# Altium PCB PCB1.PcbDoc
Units mm, origin at the board's own origin, x right, y up, seen from the top; angles counter-clockwise.
Board outline 28 x 36 mm, 2 copper layers (Component Side, Bottom Layer), stack 1.671 mm thick; 44 components, 38 nets, 147 pads, 150 vias.
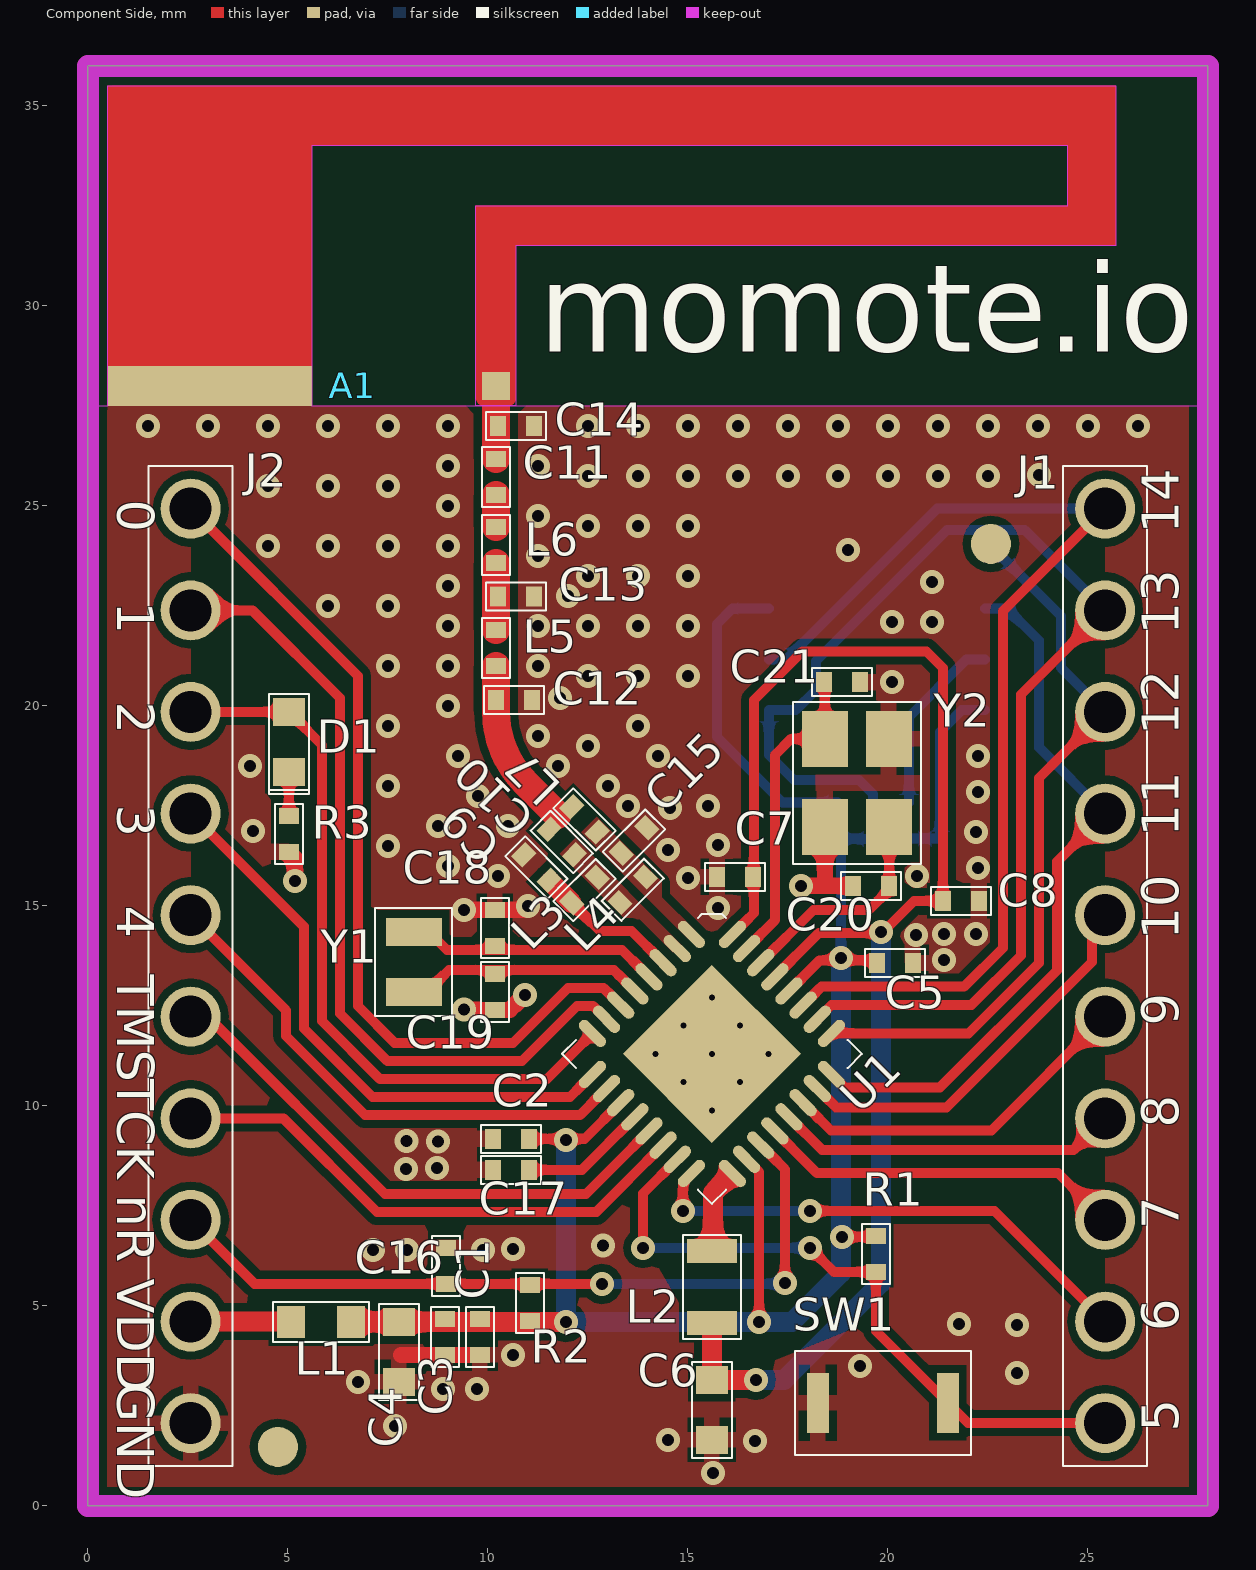
[diagram p0: Component Side view]
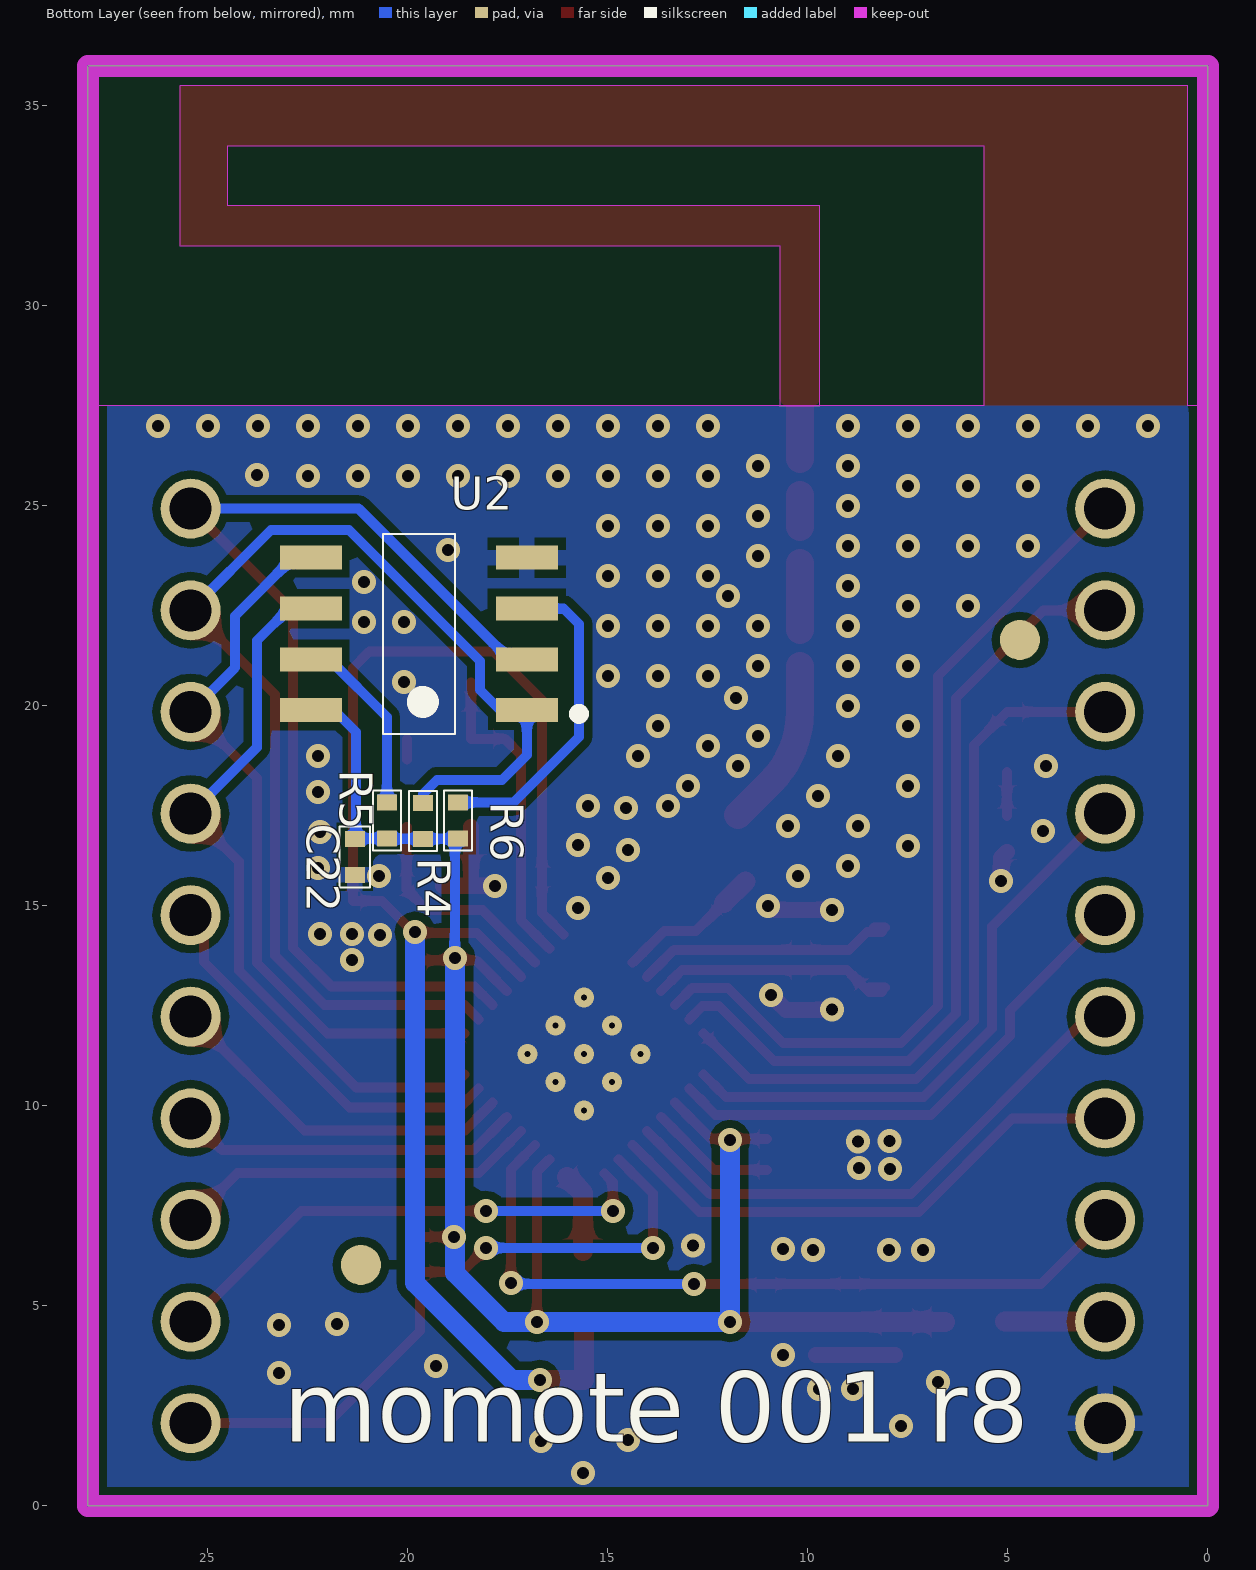
[diagram p1: Bottom Layer view, seen from below]
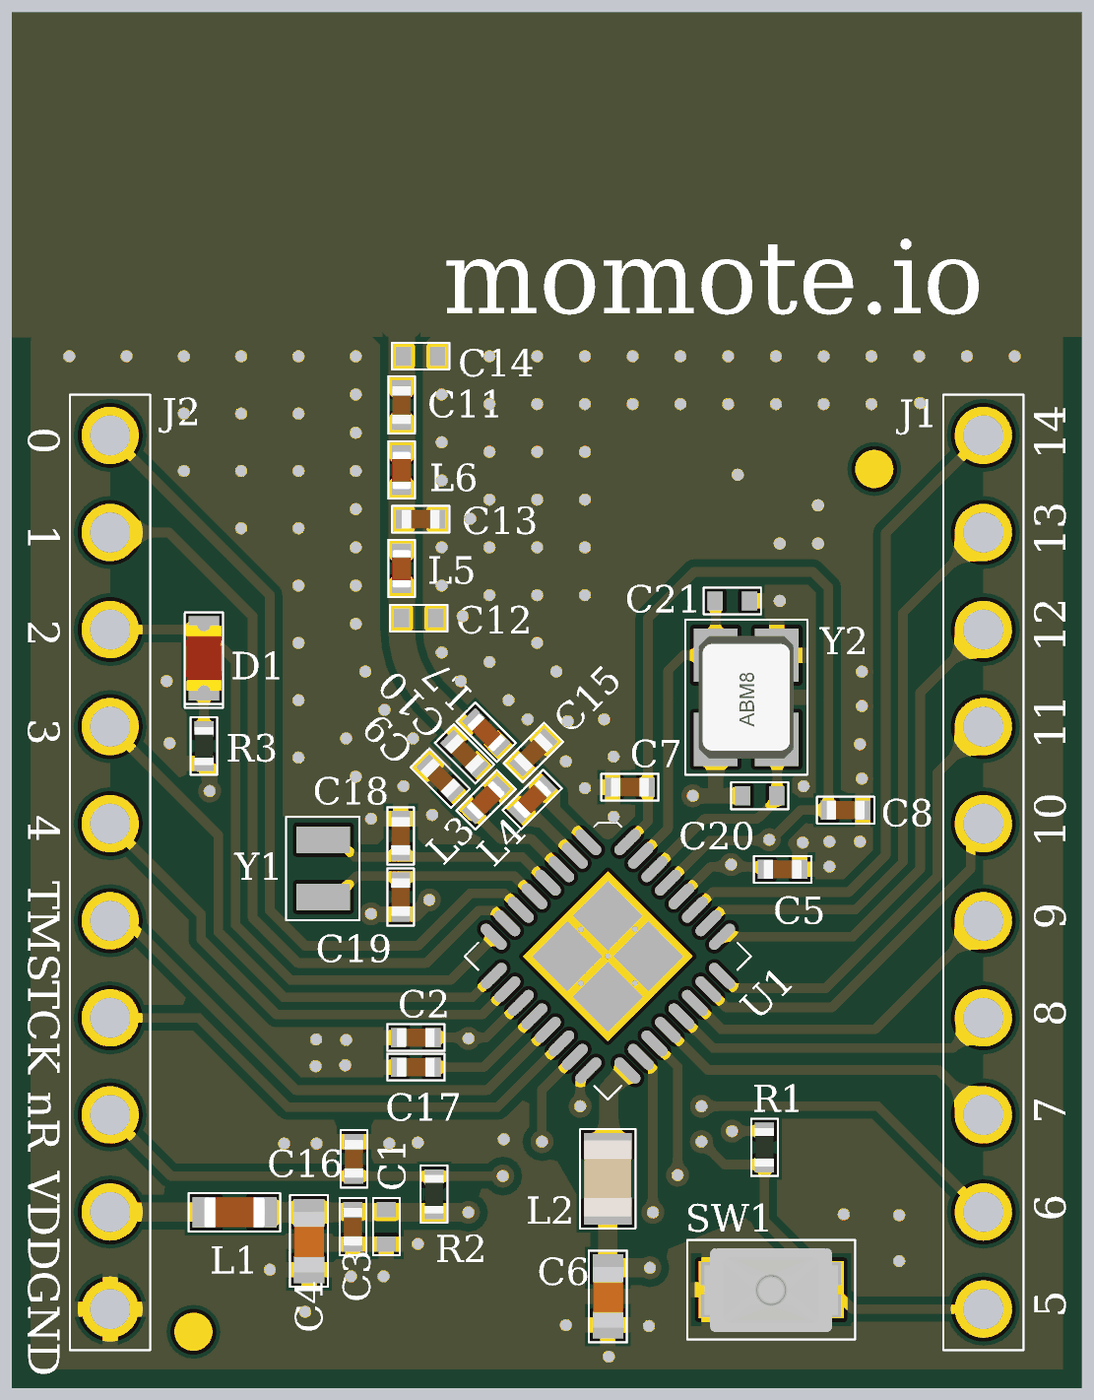
[diagram p2: 3D render of the assembled board from above, using the file's embedded part models]
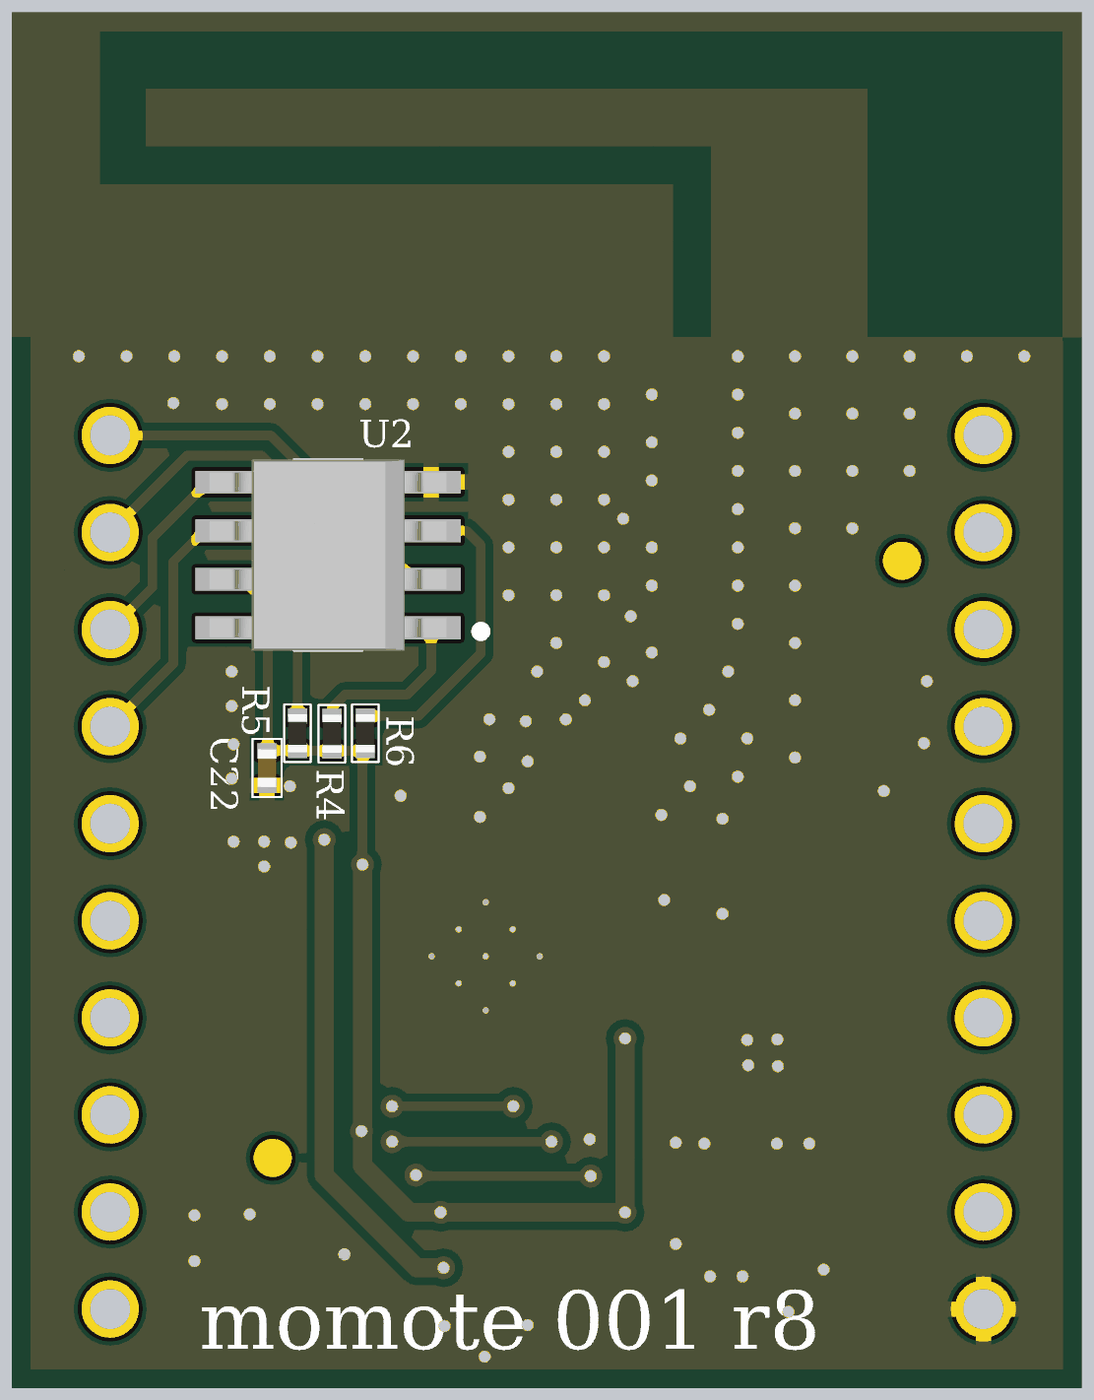
[diagram p3: 3D render of the assembled board from below, using the file's embedded part models]

## Layer stack, top to bottom
Top Solder: solder mask 0.0102, Solder Resist, Dk 3.5
Component Side: signal copper 0.0356
Dielectric 1: core 1.6, FR-4, Dk 4.2
Bottom Layer: signal copper 0.0356
Solder Side: solder mask 0.0102, Solder Resist, Dk 3.5

## Board outline
0,0 0,36 28,36 28,0

## Design rules (kind name [scope] priority, off if disabled: settings)
Clearance [NOT InComponent('A1') AND NOT InComponent('C13') vs NOT InComponent('A1') AND NOT InComponent('C13')] p1: gap=0.2
ComponentClearance ComponentClearance_BATT [All vs InComponent('BT1')] p1 off: gap=0.254 collisioncheckmode=3 verticalgap=0.254 showdistances=FALSE
ComponentClearance [not (HasFootprint('ANTENNA_PCB_1') or HasFootprint('BS-2-1')) vs not (HasFootprint('ANTENNA_PCB_1') or HasFootprint('BS-2-1'))] p2 off: gap=0.254 collisioncheckmode=3 verticalgap=0.254 showdistances=FALSE
MinimumSolderMaskSliver [All vs InComponent('U1')] p1: minsoldermaskwidth=0.02
MinimumSolderMaskSliver MinimumSolderMaskSliver_1 [NOT InComponent('A1')] p2: minsoldermaskwidth=0.025
PlaneConnect [All] p1: planeconnectstyle=Direct reliefexpansion=0.508 reliefentries=4 reliefconductorwidth=0.254 reliefairgap=0.254
PolygonConnect PolygonConnect_1 [InComponentClass('RF')] p1: connectstyle=Direct reliefconductorwidth=0.3 reliefentries=4 polygonreliefangle="90 Angle" airgapwidth=0.2
PolygonConnect PolygonConnect_2 [All vs IsVia] p2: connectstyle=Direct reliefconductorwidth=0.3 reliefentries=4 polygonreliefangle="90 Angle" airgapwidth=0.2
PolygonConnect PolygonConnect_3 [All vs InNet('RF_N') OR InNet('RF_P')] p3: connectstyle=Direct reliefconductorwidth=0.3 reliefentries=4 polygonreliefangle="90 Angle" airgapwidth=0.2
PolygonConnect [All] p4: connectstyle=Relief reliefconductorwidth=0.4 reliefentries=4 polygonreliefangle="90 Angle" airgapwidth=0.2
RoutingVias [All] p1: holewidth=0.2 width=0.5 viastyle="Through Hole" minholewidth=0.2 minwidth=0.5 maxholewidth=1 maxwidth=2
ShortCircuit ShortCircuit_antenna [All vs InComponent('A1')] p1: allowed=TRUE
ShortCircuit [All] p2: allowed=FALSE
SilkToSilkClearance [All] p1: silktosilkclearance=0.051
SilkToSolderMaskClearance [NOT InComponent('A1')] p1: minsilkscreentomaskgap=0 clearancetoexposedcopper=TRUE
SolderMaskExpansion [All] p1: expansion=0.1
Width [All] p1: maxlimit=1 minlimit=0.25 preferedwidth=0.3 minimp=50.000000 maximp=50.000000 favimp=50.000000
24 further rules are at their usual default settings.

## Classes and differential pairs
polygon class rf: NONET_L01_P023 NONET_L01_P025
component class RF: A1 C9 C10 C11 C12 C13 C14 C15 L3 L4 L5 L6 L7

## Components (designator, comment, footprint, x,y, rotation, side; value= is the part's Value field where it differs from the comment)
A1 "2.45GHz" ANTENNA_PCB_INATEL3 10.2,28 r0 top
C1 "DNM" 0402 9.8,4.225 r90 top
C2 "100nF" "0402 - CAP" 10.575,9.175 r0 top
C3 "100nF" "0402 - CAP" 8.925,4.225 r90 top
C4 "10uF" "0603 - CAP" 7.775,3.85 r90 top
C5 "100nF" "0402 - CAP" 20.175,13.576 r180 top
C6 "10uF" "0603 - CAP" 15.6,2.4 r90 top
C7 "100nF" "0402 - CAP" 16.175,15.725 r0 top
C8 "100nF" "0402 - CAP" 21.825,15.125 r180 top
C9 "6.8pF" "0402 - CAP" 11.212,15.961 r135 top
C10 "1pF" "0402 - CAP" 11.848,16.598 r315 top
C11 "12pF" "0402 - CAP" 10.2,25.725 r270 top
C12 "DNM" 0402 10.65,20.15 r180 top
C13 "1pF" "0402 - CAP" 10.7,22.737 r180 top
C14 "DNM" 0402 10.7,27 r180 top
C15 "1pF" "0402 - CAP" 13.651,16.633 r45 top
C16 "100nF" "0402 - CAP" 8.95,6 r270 top
C17 "1uF" "0402 - CAP" 10.575,8.4 r0 top
C18 "12pF" "0402 - CAP" 10.175,14.45 r270 top
C19 "12pF" "0402 - CAP" 10.175,12.85 r90 top
C20 "DNM" 0402 19.575,15.5 r0 top
C21 "DNM" 0402 18.857,20.598 r180 top
C22 "100nF" "0402 - CAP" 21.325,16.225 r90 bottom
D1 "Status" "0603 - LED" 5.025,19.1 r270 top
J1 "CONN" "CONN_HEADER ARDUINO SHIELD" 25.43,2.07 r90 top
J2 "CONN" "CONN_HEADER ARDUINO SHIELD" 2.57,2.07 r90 top
L1 "BLM18HE152SN1" "0603 - IND" 5.825,4.6 r180 top
L2 "10uH" "0805 - CAP" 15.6,5.475 r90 top
L3 "2.4nH" "0402 - IND" 12.414,15.396 r225 top
L4 "6.2nH" "0402 - IND" 13.619,15.406 r45 top
L5 "2nH" "0402 - IND" 10.2,21.45 r270 top
L6 "2nH" "0402 - IND" 10.2,24.025 r270 top
L7 "2.7nH" "0402 - IND" 12.414,17.163 r315 top
R1 "100K" "0402 - RES" 19.7,6.3 r90 top
R2 "100K" "0402 - RES" 11.05,5.075 r270 top
R3 "100R" "0402 - RES" 5.025,16.8 r90 top
R4 "2K2" "0402 - RES" 19.625,17.125 r270 bottom
R5 "10K" "0402 - RES" 20.525,17.137 r270 bottom
R6 "10K" "0402 - RES" 18.75,17.137 r270 bottom
SW1 "EVP-AWCA2A" EVP-AWCA2A 19.875,2.575 r180 top
U1 "CC2650F128RHB" "CC2650F128RHB - CM" 15.6,11.3 r45 top
U2 "W25X40CLSNIG" SOIC-8 19.725,21.8 r270 bottom
Y1 "32.768kHz" FC-12M 8.15,13.6 r270 top
Y2 "24MHz" XT_DFN_LCC_32X25 19.223,18.078 r90 top

## Footprints (in the part's own frame and the unit in brackets; to place one, negate y for a bottom-side part, rotate by r counter-clockwise, add the part's x,y. Pads: shape width x height; smd on the part's side, far side on the other; paste and mask are expansions set on the pad)
0402 [mm]
  rect 0.4x0.5 smd: 1(-0.45,0) 2(0.45,0)
  silkscreen extent -0.75,-0.35 0.75,0.35
"0402 - CAP" [mm]
  rect 0.4x0.5 smd: 1(-0.45,0) 2(0.45,0)
  silkscreen extent -0.75,-0.35 0.75,0.35, body extent -0.5,-0.25 0.5,0.25, height 0.49
"0402 - IND" [mm]
  rect 0.4x0.5 smd: 1(-0.45,0) 2(0.45,0)
  silkscreen extent -0.75,-0.35 0.75,0.35, body extent -0.49,-0.25 0.51,0.25, height 0.49
"0402 - RES" [mm]
  rect 0.4x0.5 smd: 1(-0.45,0) 2(0.45,0)
  silkscreen extent -0.75,-0.35 0.75,0.35, body extent -0.5,-0.25 0.5,0.25, height 0.29
"0603 - CAP" [mm]
  rect 0.7x0.8 smd: 1(-0.75,0) 2(0.75,0)
  silkscreen extent -1.2,-0.5 1.2,0.5, body extent -0.83,-0.41 0.77,0.39, height 0.49
"0603 - IND" [mm]
  rect 0.7x0.8 smd: 1(-0.75,0) 2(0.75,0)
  silkscreen extent -1.2,-0.5 1.2,0.5, body extent -0.8,-0.4 0.8,0.4, height 0.79
"0603 - LED" [mm]
  rect 0.7x0.8 smd: 1(-0.75,0) 2(0.75,0)
  silkscreen extent -1.2,-0.5 1.3,0.5, body extent -0.85,-0.45 0.85,0.45, height 0.9
"0805 - CAP" [mm]
  rect 0.6x1.25 smd: 1(-0.9,0) 2(0.9,0)
  silkscreen extent -1.3,-0.72 1.3,0.72, body extent -0.99,-0.62 1.01,0.63, height 0.58
ANTENNA_PCB_INATEL3 [mm]
  rect 0.7x0.7 smd paste-2 mask-2: 1(0,0)
  rect 5.1x1 smd paste-2 mask-2: 2(-7.15,0)
  Component Side region: -9.7,-0.5 -9.7,7.5 15.5,7.5 15.5,3.5 0.5,3.5 0.5,-0.3 0.494,-0.352 0.474,-0.4 0.442,-0.442 0.4,-0.474 0.352,-0.493 0.3,-0.5 -0.3,-0.5 -0.351,-0.494 -0.4,-0.474 -0.441,-0.442 -0.473,-0.4 -0.483,-0.375 -0.493,-0.352 -0.5,-0.3 -0.5,4.5 14.3,4.5 14.3,6 -4.6,6 -4.6,-0.5
  Keep-Out Layer region: -9.7,8 -10.2,8 -10.2,-0.5 -9.7,-0.5 -9.7,7.5 15.5,7.5 15.5,3.5 0.5,3.5 0.5,-0.5 -0.5,-0.5 -0.5,4.5 14.3,4.5 14.3,6 -4.6,6 -4.6,-0.5 17.8,-0.5 17.8,8
"CC2650F128RHB - CM" [mm]
  oval 0.28x0.85 smd: 1(1.75,2.475) 2(1.25,2.475) 3(0.75,2.475) 4(0.25,2.475) 5(-0.25,2.475) 6(-0.75,2.475) 7(-1.25,2.475) 8(-1.75,2.475) 17(-1.75,-2.475) 18(-1.25,-2.475) 19(-0.75,-2.475) 20(-0.25,-2.475) 21(0.25,-2.475) 22(0.75,-2.475) 23(1.25,-2.475) 24(1.75,-2.475)
  oval 0.85x0.28 smd: 9(-2.475,1.75) 10(-2.475,1.25) 11(-2.475,0.75) 12(-2.475,0.25) 13(-2.475,-0.25) 14(-2.475,-0.75) 15(-2.475,-1.25) 16(-2.475,-1.75) 25(2.475,-1.75) 26(2.475,-1.25) 27(2.475,-0.75) 28(2.475,-0.25) 29(2.475,0.25) 30(2.475,0.75) 31(2.475,1.25) 32(2.475,1.75)
  rect 3.15x3.15 smd paste-5: 33(0,0)
  silkscreen extent -2.65,-2.65 2.65,2.65, body extent -2.54,-2.54 2.54,2.54, height 1
"CONN_HEADER ARDUINO SHIELD" [mm]
  round 1.5 hole 1.05 paste-4: 1(0,0) 2(2.54,0) 3(5.08,0) 4(7.62,0) 5(10.16,0) 6(12.7,0) 7(15.24,0) 8(17.78,0) 9(20.32,0) 10(22.86,0)
  silkscreen extent -1.07,-1.05 23.92,1.05
EVP-AWCA2A [mm]
  rect 0.55x1.5 smd paste-2: 1(-1.625,0) 2(1.625,0)
  silkscreen extent -2.2,-1.3 2.2,1.3, body extent -1.75,-1.09 1.75,1.11, height 0.56
FC-12M [mm]
  rect 0.7x1.4 smd: 1(-0.75,0) 2(0.75,0)
  silkscreen extent -1.35,-0.97 1.35,0.95, body extent -1.02,-0.6 1.02,0.6, height 0.6
SOIC-8 [mm]
  rect 0.6x1.55 smd: 1(1.905,2.7) 2(0.635,2.7) 3(-0.635,2.7) 4(-1.905,2.7) 5(-1.905,-2.7) 6(-0.635,-2.7) 7(0.635,-2.7) 8(1.905,-2.7)
  silkscreen extent -2.5,-0.9 2.5,4.12, body extent -2.5,-3.1 2.5,3.1, height 1.75
XT_DFN_LCC_32X25 [mm]
  rect 1.4x1.15 smd: 1(-1.1,-0.8) 2(1.1,0.8) 3(-1.1,0.8) 3(1.1,-0.8)
  silkscreen extent -2.02,-1.6 2.03,1.6, body extent -1.6,-1.24 1.6,1.24, height 0.8

## Part data
A1: library part "ANTENNA 2.4GHz_INATEL", "ANTENNA 2.4GHz INATEL"
C1 C12 C14 C20 C21: library part CAP
C2 C3 C5 C7 C8 C16 C22: library part CAP, "CAP CER 0.1UF 6.3V 10% X7R 0402"
C4 C6: library part CAP, "CAP CER 10UF 6.3V 20% X5R 0603"
C9: library part CAP, "CAP CER 6.8PF 50V NP0 0402"
C10 C13 C15: library part CAP, "CAP CER 1PF 50V NP0 0402"
C11 C18 C19: library part CAP, "CAP CER 12PF 50V NP0 0402"
C17: library part CAP, "CAP CER 1UF 10V 10% X5R 0402"
D1: library part LED_R, "LED SUPER RED CLR THIN 0603 SMD"
J1 J2: "10POS SIL VERTICAL PIN HEADER"
L1: library part INDUCTOR, "FERRITE CHIP 1500 OHM 500MA 0603"
L2: library part INDUCTOR, "FIXED IND 10UH 110MA 520 MOHM"
L3: library part INDUCTOR, "FIXED IND 2.4NH 300MA 160 MOHM"
L4: library part INDUCTOR, "FIXED IND 6.2NH 300MA 220 MOHM"
L5 L6: library part INDUCTOR, "FIXED IND 2NH 300MA 100 MOHM SMD"
L7: library part INDUCTOR, "FIXED IND 2.7NH 300MA 150 MOHM"
R1 R2: library part RES, "RES SMD 100K OHM 5% 1/10W 0402"
R3: library part RES, "RES SMD 100 OHM 5% 1/10W 0402"
R4: library part RES, "RES SMD 2.2K OHM 5% 1/10W 0402"
R5 R6: library part RES, "RES SMD 10K OHM 5% 1/10W 0402"
SW1: library part SW_EVPAW, "Tactile Switch SPST-NO Top Actuated Surface Mount"
U1: "IC MCU 128KB FLASH PHY 32VQFN"
U2: library part SPI_FLASH_SOIC_8, "IC FLASH 4MBIT 104MHZ 8SOIC"
Y1: library part XTAL1, "Crystal 32.7680kHz 20ppm 12.5pF 90 kOhm -40°C - 85°C Surface Mount 2-SMD"
Y2: library part XTAL1, "Crystal 24.0000MHz 10ppm 9pF 40 Ohm -40°C - 85°C Surface Mount 4-SMD, No Lead (DFN, LCC)"

## Free pads (board coordinates)
  round 1 smd far side paste-1: 0(4.7,21.65) 0(21.175,6.025)
  round 1 smd paste-1: 0(4.75,1.475) 0(22.575,24.05)

## Via types
v1: diameter 0.6, hole 0.3, Component Side to Bottom Layer, tented both sides, 141 vias
v2: diameter 0.5, hole 0.15, Component Side to Bottom Layer, tented bottom, 9 vias

## Nets (pads, with @x,y where several pads share a name; then routed paths per layer and width w, separated by ;. In a path a pad name is that pad's centre, name@x,y a point inside that pad or via, vN(x,y) a via of type N, cw(c..) or ccw(c..) an arc to the next point about the centre after c; other vN are vias at no path point)
DCDC_SW: L2.2 U1.17 | length 2
  Component Side w0.5: L2.2@15.625,6.375 15.625,7.825 U1.17@16.025,8.225
DIO_0: J2.10 U1.6 | length 21.9
  Component Side w0.25: J2.10 6.75,20.75 6.75,12.496 7.671,11.575 10.625,11.575 12,12.95 12.889,12.95 U1.6
DIO_1: J2.9 U1.7 | length 20.4
  Component Side w0.25: J2.9 4.11,22.39 6.3,20.2 6.3,12.309 7.484,11.125 10.85,11.125 12.225,12.5 12.632,12.5 U1.7
DIO_2: D1.1 J2.8 U1.8 | length 18.4
  Component Side w0.25: J2.8 D1.1 5.85,19.025 5.85,12.123 7.298,10.675 11.475,10.675 U1.8
DIO_3: J2.7 U1.9 | length 14.7
  Component Side w0.25: J2.7 5.4,14.48 5.4,11.936 7.111,10.225 12.05,10.225 U1.9
DIO_4: J2.6 U1.10 | length 13.1
  Component Side w0.25: J2.6 4.95,12.39 4.95,11.75 6.925,9.775 12.307,9.775 U1.10
DIO_5: J1.1 R1.1 SW1.1 U1.15 | length 17.2
  Component Side w0.25: v1(13.875,6.45) 13.875,7.807 U1.15 ; v1(18.05,6.45) 18.65,5.85 R1.1 19.7,4.375 SW1.1 22.005,2.07 J1.1 J1.1@25.43,2.437
  Bottom Layer w0.25: v1(13.875,6.45) v1(18.05,6.45)
DIO_6: J1.2 U1.16 | length 12.7
  Component Side w0.25: v1(14.875,7.375) 14.875,8.1 U1.16 ; v1(18.051,7.375) 22.665,7.375 J1.2
  Bottom Layer w0.25: v1(14.875,7.375) v1(18.051,7.375)
DIO_7: J1.3 U1.20 | length 9.2
  Component Side w0.25: U1.20 18.221,8.325 24.255,8.325 J1.3
DIO_8: J1.4 U1.21 | length 8.6
  Component Side w0.25: U1.21 18.351,8.903 24.643,8.903 J1.4
DIO_9: J1.5 U1.22 | length 9
  Component Side w0.25: U1.22 18.574,9.387 22.587,9.387 J1.5
DIO_10: J1.6 U1.23 | length 9.9
  Component Side w0.25: U1.23 18.706,9.961 21.461,9.961 25.1,13.6 25.1,14.44 J1.6
DIO_11: J1.7 U1.24 U2.6 | length 18.1
  Component Side w0.25: U1.24 18.911,10.464 21.301,10.464 24.225,13.389 24.225,16.105 J1.7
  Bottom Layer w0.25: U2.6 22.972,22.435 23.775,21.632 23.775,18.965 J1.7
DIO_12: J1.8 U1.25 U2.5 | length 18.2
  Component Side w0.25: U1.25 22.013,11.813 23.775,13.575 23.775,18.195 J1.8
  Bottom Layer w0.25: U2.5 22.87,23.705 24.325,22.25 24.325,20.955 J1.8
DIO_13: J1.9 R4.1 U1.26 U2.1 | length 31.1
  Component Side w0.25: U1.26 18.59,12.522 22.084,12.522 23.325,13.764 23.325,20.285 J1.9
  Bottom Layer w0.25: R4.1 19.625,17.8 19.275,18.15 17.65,18.15 17.025,18.775 U2.1 17.695,19.895 18.2,20.4 18.2,21.125 21.475,24.4 23.42,24.4 J1.9
DIO_14: J1.10 U1.27 U2.2 | length 27.6
  Component Side w0.25: U1.27 18.34,12.979 21.904,12.979 22.875,13.95 22.875,22.375 J1.10
  Bottom Layer w0.25: U2.2 17.465,21.165 21.23,24.93 J1.10
GND: A1.2 C1.1 C2.1 C3.1 C4.1 C5.1 C6.1 C7.1 C8.1 C9.2 C12.1 C13.1 C14.1 C15.2 C16.1 C17.1 C18.1 C19.1 C20.1 C21.1 C22.1 J2.1 R3.1 SW1.2 U1.33 U2.4 Y2.3 | length 9.4
  Component Side w0.25: Y2.3@20.023,18.656 Y2.3@20.023,19.178
  Component Side w0.4: R3.1 5.175,16.2 v1(5.175,15.625) ; 7.825,3.775 C3.1 C1.1 ; v1@9.4,12.4 10.55,12.4 v1(10.925,12.775) ; v1(9.4,14.9) 10.9,14.9 v1(11,15) ; v1@17.775,15.5 C20.1 ; 18.423,15.502 Y2.3@18.423,16.978
  other v1: 15.625,0.825 16.675,1.625 14.5,1.65 7.675,2 8.875,2.925 9.725,2.925 6.75,3.1 23.225,3.325 19.3,3.5 10.625,3.775 23.225,4.525 21.775,4.55 7.125,6.4 7.975,6.4 9.875,6.4 10.625,6.425 12.875,6.512 7.95,8.425 8.725,8.45 7.963,9.125 8.75,9.112 9.4,12.412 21.4,13.651 20.7,14.275 21.4,14.301 22.2,14.3 15.75,14.95 17.825,15.5 15,15.7 10.25,15.75 20.725,15.75 22.25,15.95 9,16 14.5,16.4 7.5,16.5 15.75,16.525 22.2,16.85 4.125,16.875 8.75,17 10.5,17 14.55,17.45 13.5,17.5 15.5,17.5 9.75,17.75 22.25,17.85 7.5,18 13,18 4.05,18.5 11.75,18.5 9.25,18.75 14.25,18.75 22.25,18.75 12.5,19 11.25,19.25 7.5,19.5 13.75,19.5 9,20 11.8,20.2 20.1,20.6 12.5,20.75 13.75,20.75 15,20.75 7.5,21 9,21 11.25,21 9,22 11.25,22 12.5,22 13.75,22 15,22 20.1,22.1 21.1,22.1 6,22.5 7.5,22.5 12,22.75 9,23 21.1,23.1 12.5,23.25 13.75,23.25 15,23.25 11.25,23.75 19,23.9 4.5,24 6,24 7.5,24 9,24 12.5,24.5 13.75,24.5 15,24.5 11.25,24.75 9,25 4.5,25.5 6,25.5 7.5,25.5 12.5,25.75 13.75,25.75 15,25.75 16.25,25.75 17.5,25.75 18.75,25.75 20,25.75 21.25,25.75 22.5,25.75 23.775,25.775 9,26 11.25,26 1.5,27 3,27 4.5,27 6,27 7.5,27 9,27 12.5,27 13.75,27 15,27 16.25,27 17.5,27 18.75,27 20,27 21.25,27 22.5,27 23.75,27 25,27 26.25,27
  other v2: 15.6,9.886 14.893,10.593 16.307,10.593 14.186,11.3 15.6,11.3 17.014,11.3 14.893,12.007 16.307,12.007 15.6,12.714
NetA1_1: A1.1 C11.1 C14.2 | length 1.8
  Component Side w0.7: C11.1 A1.1
NetC9_1: C9.1 L3.2 U1.3 | length 3.7
  Component Side w0.25: L3.2 12.803,14.37 13.59,14.37 U1.3
  Component Side w0.5: C9.1@11.565,15.608 L3.2
NetC10_1: C10.1 C12.2 L5.2 L7.1 | length 4.3
  Component Side w0.7: L5.2 10.2,19.866 ccw(c12.74,19.866) 10.944,18.07 11.745,17.27
NetC11_2: C11.2 L6.1 | length 0.8
  Component Side w0.7: L6.1 C11.2
NetC13_2: C13.2 L5.1 L6.2 | length 1.7
  Component Side w0.7: L5.1 L6.2
NetC17_2: C17.2 U1.12 | length 3.2
  Component Side w0.25: C17.2 12.346,8.4 U1.12
NetC18_2: C18.2 U1.4 Y1.1 | length 6.6
  Component Side w0.25: Y1.1@8.072,14.456 Y1.1@8.344,14.456 ; Y1.1 8.525,14.35 8.975,13.9 13.354,13.9 U1.4
NetC19_2: C19.2 U1.5 Y1.2 | length 6.4
  Component Side w0.25: Y1.2@8.072,12.956 Y1.2@8.456,12.956 ; Y1.2 8.475,12.85 9.025,13.4 13.146,13.4 U1.5
NetC20_2: C20.2 U1.30 Y2.1 | length 5.8
  Component Side w0.25: U1.30 18.139,14.9 19.506,14.9 19.556,14.95 19.575,14.95 20.032,15.407 Y2.1@20.032,16.969 ; Y2.1@20.023,16.684 Y2.1
NetC21_2: C21.2 U1.31 Y2.2 | length 8
  Component Side w0.25: U1.31 17.175,14.643 17.175,18.775 17.578,19.178 Y2.2 C21.2@18.423,20.581
NetD1_2: D1.2 R3.2 | length 1.1
  Component Side w0.25: R3.2 D1.2
NetR5_1: R5.1 U2.7 | length 4.6
  Bottom Layer w0.25: R5.1 20.525,19.725 21.965,21.165 U2.7
NetR6_1: R6.1 U2.3 | length 8
  Bottom Layer w0.25: U2.3 16.11,22.435 15.725,22.05 15.725,19.225 17.363,17.587 R6.1
NRESET: C16.2 J2.3 R2.1 U1.19 | length 19.3
  Component Side w0.25: J2.3 4.17,5.55 v1(12.85,5.55) ; U1.19 17.425,8.414 17.425,5.6 v1@17.45,5.575
  Bottom Layer w0.25: v1(12.85,5.55) 17.425,5.55 v1@17.45,5.575
  other v1: 17.425,5.575
RF_N: C10.2 L3.1 L4.1 U1.2
RF_P: C15.1 L4.2 L7.2 U1.1
TCK: J2.4 U1.14 | length 13.5
  Component Side w0.25: J2.4 4.885,9.69 7.225,7.35 12.711,7.35 U1.14
TMS: J2.5 U1.13 | length 13.9
  Component Side w0.25: J2.5 2.995,12.23 7.425,7.8 12.454,7.8 U1.13
VDD: J2.2 L1.2 | length 2.5
  Component Side w0.5: J2.2 L1.2@5.075,4.61
VDDR: C6.2 C7.2 C8.2 L2.1 U1.29 U1.32 | length 37.7
  Component Side w0.25: U1.32 16.65,14.825 16.65,20.15 17.86,21.36 20.965,21.36 21.375,20.95 C8.2 20.65,15.125 19.851,14.326 18.272,14.326 U1.29
  Component Side w0.5: L2.1 C6.2 v1(16.7,3.15)
  Bottom Layer w0.5: v1(16.7,3.15) 17.4,3.15 19.825,5.575 v1@19.825,14.3
  other v1: 19.825,14.351
VDDS: C1.2 C2.2 C3.2 C4.2 C5.2 C22.2 L1.1 R1.2 R2.2 R4.2 R5.2 R6.2 U1.11 U1.18 U1.28 U2.8 | length 45.2
  Component Side w0.25: C2.2 12.414,9.175 U1.11 ; U1.18@16.675,8.457 U1.18 16.779,8.353 v1(16.779,4.6) ; U1.28 18.293,13.64 19.611,13.64 C5.2@19.725,13.526 ; v1(18.851,6.725) R1.2@19.7,6.725
  Component Side w0.5: L1.1 v1(11.95,4.6)
  Bottom Layer w0.25: v1@18.825,13.602 18.825,16.675 R4.2 R5.2@20.525,16.675 ; R5.2 21.3,16.688 21.3,19.35 21.845,19.895 U2.8
  Bottom Layer w0.5: v1@11.95,9.175 v1(11.95,4.6) 17.6,4.6 18.825,5.825 v1@18.825,13.602
  other v1: 11.95,9.15 18.825,13.7

## Polygon pours and split planes (outlines as drawn)
GND on Component Side "GND_TOP" (solid, remove dead copper, pour order 28): 0,0 0,27.5 28,27.5 28,0
RF_N on Component Side "NONET_L01_P023" (solid, pour order 23): 14.833,14.033 12.179,16.687 11.793,16.301 13.423,14.671 13.8,14.671 14.635,13.835
RF_P on Component Side "NONET_L01_P025" (solid, pour order 25): 14.988,14.188 12.334,16.842 12.721,17.229 14.351,15.599 14.351,15.221 15.186,14.386
NetA1_1 on Component Side "ANT" (solid, pour order 27): 0.5,27.5 0.5,35.5 25.7,35.5 25.7,31.5 10.7,31.5 10.7,27.7 10.694,27.648 10.674,27.6 10.642,27.558 10.6,27.526 10.552,27.506 10.5,27.5 9.9,27.5 9.849,27.506 9.8,27.526 9.759,27.558 9.727,27.6 9.707,27.648 9.7,27.7 9.7,32.5 24.5,32.5 24.5,34 5.6,34 5.6,27.5
GND on Bottom Layer "GND_BOT" (solid, remove dead copper, pour order 29): 0,0 0,27.5 28,27.5 28,0

## Keep-outs
Keep-Out Layer:
  the board outline again, w0.55

## Other copper
Component Side:
  pour cut-out: 18.198,17.878 18.198,18.273 17.975,18.05
  pour cut-out: 16.452,3.352 17.75,4.65 19.687,4.65
  pour cut-out: 4.425,19.3 4.425,18.892 4.592,18.892 4.8,19.1
  pour cut-out: 14.202,6.067 14.775,5.075 14.85,5.075 15.275,5.5
  pour cut-out: 5.625,4 6.025,4 5.8,4.225
  pour cut-out: 7.3,13.85 7.3,13.35 7.45,13.35 7.475,13.375 7.475,13.85
  pour cut-out: 2.57,24.022 2.57,20.758 2.601,20.727 2.805,20.727 2.805,24.053
  pour cut-out: 2.57,15.728 2.57,16.402 2.675,16.4 2.675,15.755
  pour cut-out: 25.43,5.518 25.43,24.022 25.195,24.022 25.195,5.487
  pour cut-out: 20.1,6.4 20.1,6.2 19.95,6.2 19.95,6.4
  pour cut-out: 9.64,26.873 9.64,19.964 10.76,19.964 10.76,26.873
  pour cut-out: 9.639,27.306 9.446,27.5 9.639,27.5
  pour cut-out: 10.761,27.306 10.954,27.5 10.761,27.5

## Silkscreen, mask and mechanical layers (free items; w line width, h text height)
Top Overlay:
  text "momote.io" at 11.275,28.125 h3.8
  text "0" at 0.425,25.153 h1.6 r270
  text "14" at 27.58,24.3 h1.6 r90
  text "1" at 0.425,22.609 h1.6 r270
  text "13" at 27.58,21.778 h1.6 r90
  text "2" at 0.425,20.11 h1.6 r270
  text "12" at 27.58,19.264 h1.6 r90
  text "3" at 0.425,17.529 h1.6 r270
  text "11" at 27.58,16.726 h1.6 r90
  text "4" at 0.425,15.005 h1.6 r270
  text "10" at 27.58,14.158 h1.6 r90
  text "TMS" at 0.425,13.274 h1.6 r270
  text "9" at 27.58,11.998 h1.6 r90
  text "TCK" at 0.425,10.668 h1.6 r270
  text "8" at 27.58,9.458 h1.6 r90
  text "nR" at 0.425,7.78 h1.6 r270
  text "7" at 27.58,6.919 h1.6 r90
  text "VDD" at 0.425,5.675 h1.6 r270
  text "6" at 27.58,4.369 h1.6 r90
  text "GND" at 0.425,3.075 h1.6 r270
  text "5" at 27.58,1.85 h1.6 r90
Bottom Overlay:
  text "momote 001 r8" at 23.1,1.025 h3
Mechanical 1:
  the board outline again, w0.5